# Altium PCB G_Humi_v2_PCB.PcbDoc
Units mm, origin at the board's own origin, x right, y up, seen from the top; angles counter-clockwise.
Board outline 22.5 x 83.5 mm, 2 copper layers (Top Layer, Bottom Layer), stack 1.571 mm thick; 11 components, 7 nets, 32 pads, 6 vias.
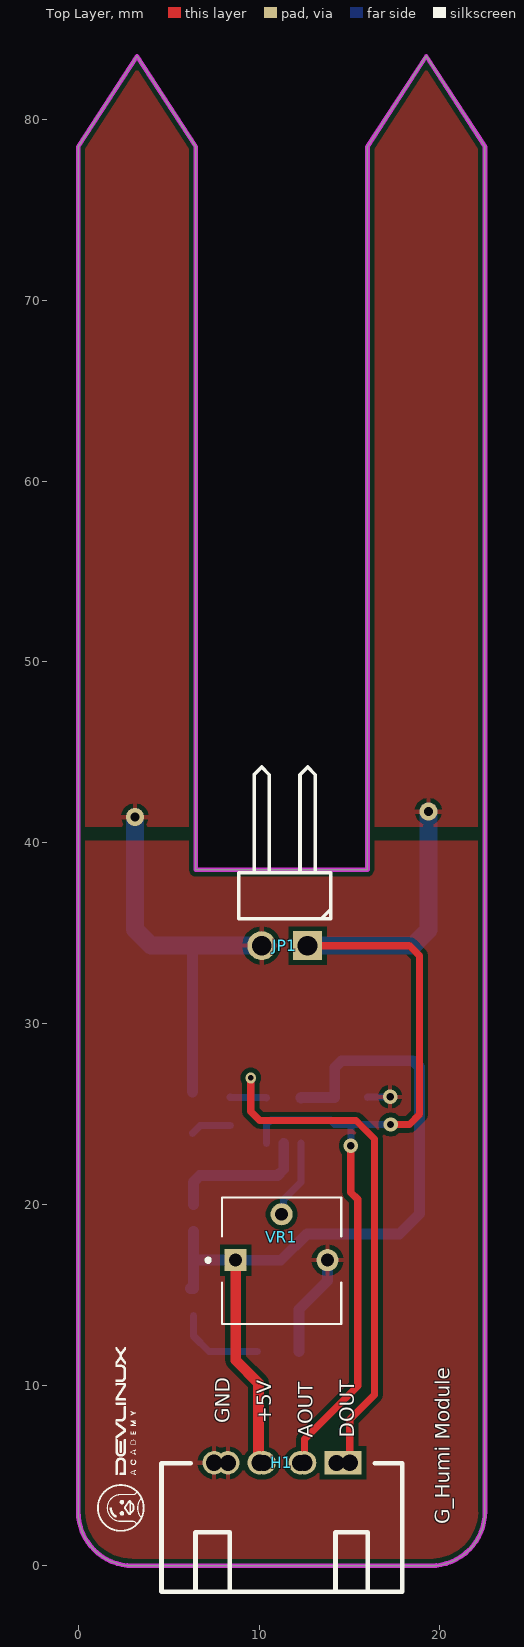
[diagram p0: Top Layer view]
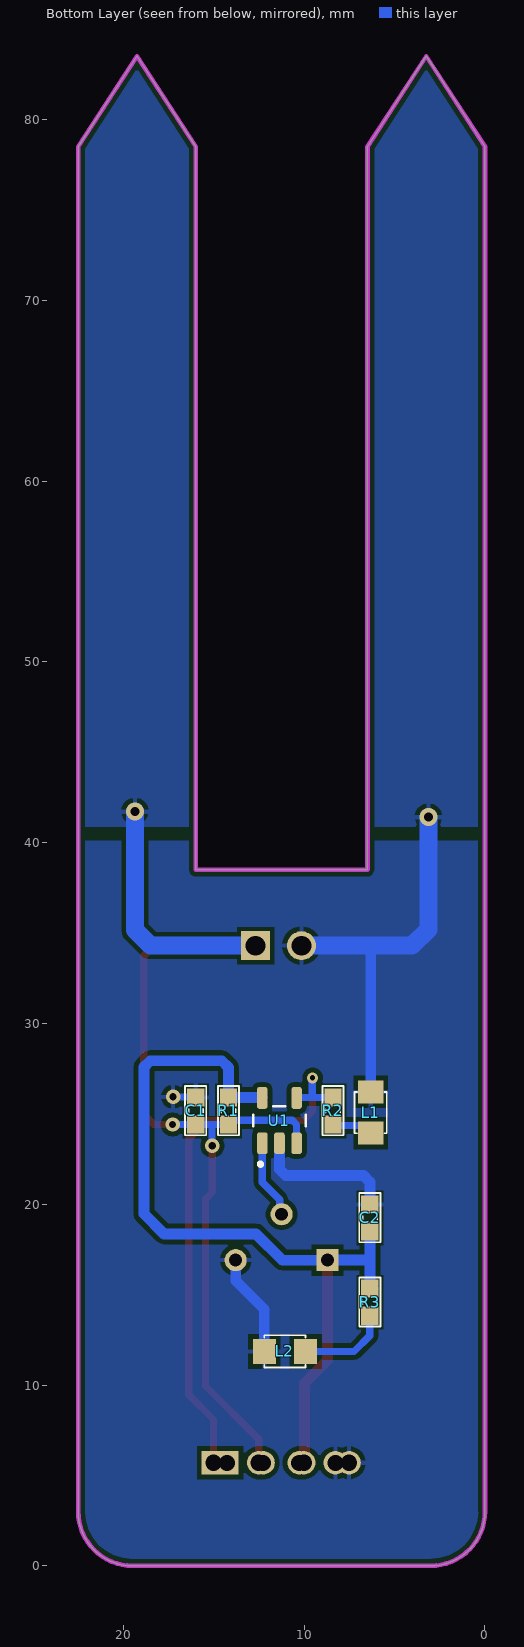
[diagram p1: Bottom Layer view, seen from below]
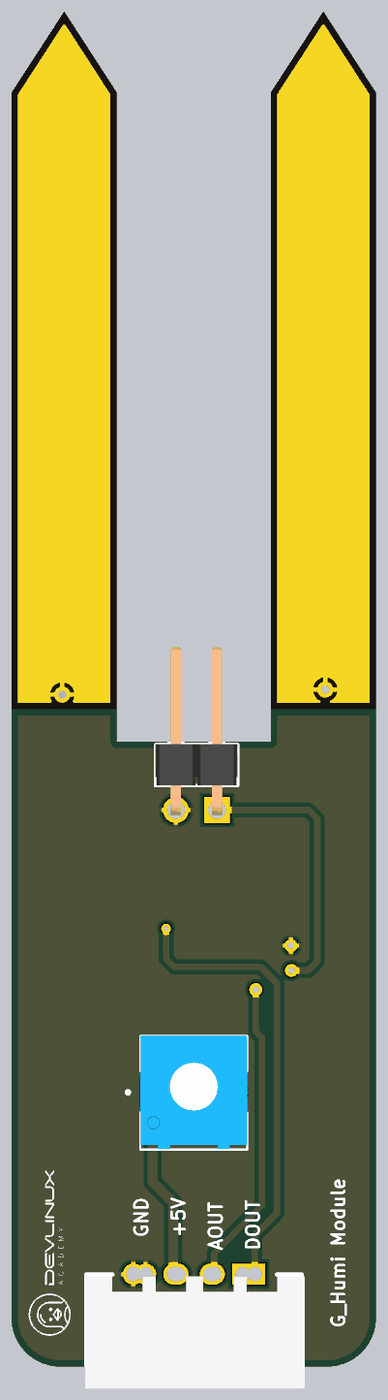
[diagram p2: 3D render of the assembled board from above, using the file's embedded part models]
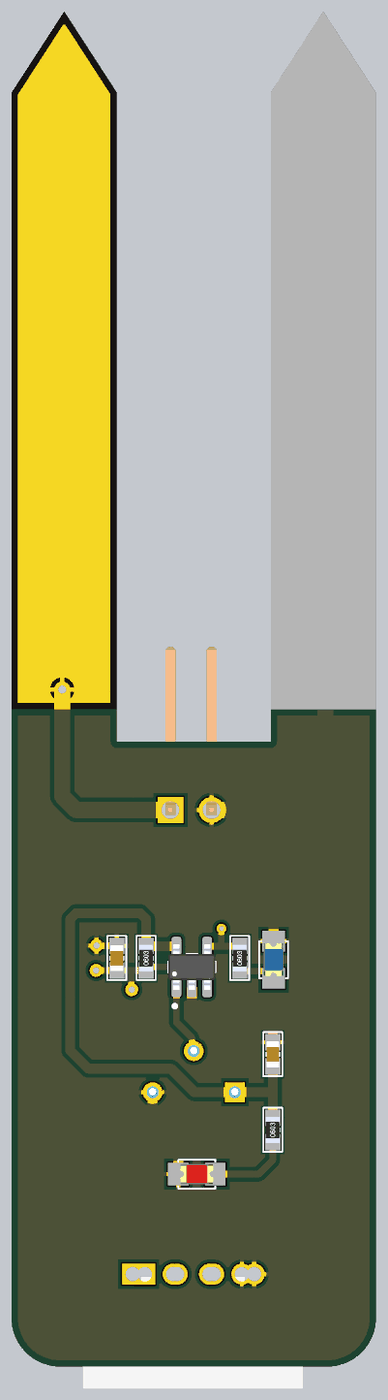
[diagram p3: 3D render of the assembled board from below, using the file's embedded part models]

## Layer stack, top to bottom
Top Solder: solder mask 0.0102, Solder Resist, Dk 3.5
Top Layer: signal copper 0.0356
Dielectric 1: dielectric 1.5, FR-4, Dk 4.8
Bottom Layer: signal copper 0.0356
Bottom Solder: solder mask 0.0102, Solder Resist, Dk 3.5

## Board outline
0,3 0,78.5 3.25,83.5 6.5,78.5 6.5,38.5 16,38.5 16,78.5 19.25,83.5 22.5,78.5 22.5,3 cw(c19.5,3) 19.5,0 3,0 cw(c3,3)

## Design rules (kind name [scope] priority, off if disabled: settings)
Clearance [All] p1: gap=0.254 ignorepadtopadclearanceinfootprint=FALSE except(0: Arc-Hole Track-Hole SMDPad-Hole THPad-Hole Via-Hole Fill-Hole Poly-Hole Region-Hole Text-Hole)
PolygonConnect [All] p1: connectstyle=Relief reliefconductorwidth=0.254 reliefentries=4 polygonreliefangle="90 Angle" airgapwidth=0.254
RoomDefinition G_Humi_v2_SCH [InComponentClass('G_Humi_v2_SCH')] p1: confinementstyle=ConfineIn formatcopy=TRUE lockcomponents=FALSE outline 28.133,-9.776 85.41,-9.776 85.41,8.385 28.133,8.385
RoutingVias [All] p1: holewidth=0.4 width=0.8 viastyle="Through Hole" minholewidth=0.3 minwidth=0.6 maxholewidth=0.5 maxwidth=1
SolderMaskExpansion [All] p1: expansion=0.102 istentingtop=FALSE
Width [All] p1: maxlimit=0.6 minlimit=0.254 preferedwidth=0.4
30 further rules are at their usual default settings.

## Components (designator, comment, footprint, x,y, rotation, side; value= is the part's Value field where it differs from the comment)
C1 "100nF" "tu 0603" 16,25.164 r90 bottom
C2 "100nF" "tu 0603" 6.37,19.24 r90 bottom
H1 "Header 4P 2.54 + 2.0 Duc Cong" "Header 4P DC 2.54 + 2.0" 14.995,5.675 r270 top
JP1 "JP 1x2 2.54" "JP 1x2 DC" 12.69,34.3 r180 top
L1 "LED BLUE" LED-0805-Blue 6.32,23.93 r90 bottom
L2 "LED RED" LED-0805-Red 9.92,11.86 r0 bottom
R1 "10k" "tro smd 0603" 14.19,25.164 r90 bottom
R2 "1k" "tro smd 0603" 8.41,25.164 r90 bottom
R3 "1k" "tro smd 0603" 6.37,14.58 r90 bottom
U1 "LM321MF" SOT95P280X145-5N 11.37,24.625 r90 bottom
VR1 "10k" TRIM_3362P-1-102 11.25,16.904 r0 top

## Footprints (in the part's own frame and the unit in brackets; to place one, negate y for a bottom-side part, rotate by r counter-clockwise, add the part's x,y. Pads: shape width x height; smd on the part's side, far side on the other; paste and mask are expansions set on the pad)
"Header 4P DC 2.54 + 2.0" [mm]
  rect 1.3x1.3 hole 0.889: 1(-0.025,0.025) 1(-0.022,-0.719)
  round 1.3 hole 0.889: 2(-0.025,-2.475) 2(-0.022,-2.719) 3(-0.025,-4.975) 3(-0.022,-4.719) 4(-0.025,-7.475) 4(-0.022,-6.718)
  silkscreen extent 0,-10.39 7.11,2.92, body extent 0.13,-10.48 7.06,3.11, height 7.38
"JP 1x2 DC" [mm] "JP 1x2 DC"
  rect 1.6x1.6 hole 1.1: 1(0,0)
  round 1.6 hole 1.1: 2(2.54,0)
  silkscreen extent -1.27,-9.88 3.81,-1.5, body extent -1.27,-10.06 3.81,0.3, height 2.55
LED-0805-Blue [mil]
  rect 50x55 smd: 1(0,0) 2(90,0)
  silkscreen extent 0,-35 90,35, body extent 5,-25 85,25, height 43
LED-0805-Red [mil]
  rect 50x55 smd: 1(0,0) 2(90,0)
  silkscreen extent 0,-35 90,35, body extent 5,-25 85,25, height 43
SOT95P280X145-5N [mm]
  rrect50% 1.21x0.59 smd: 1(-1.255,0.95) 2(-1.255,0) 3(-1.255,-0.95) 4(1.255,-0.95) 5(1.255,0.95)
  silkscreen extent -2.51,-1.45 0.8,1.45, body extent -1.4,-1.45 1.4,1.45, height 1.45
TRIM_3362P-1-102 [mm]
  rect 1.222x1.222 / inner round 1.222 / far side rect 1.222x1.222 hole 0.714: 1(-2.54,0)
  round 1.222 hole 0.714: 2(0,2.54) 3(2.54,0)
  silkscreen extent -4.16,-3.53 3.3,3.47, body extent -3.3,-3.49 3.3,3.49, height 4.88
"tro smd 0603" [mm] "Chip Capacitor, 2-Leads, Body 1,60x0,80mm, IPC Medium Density"
  rect 1x0.95 smd mask+0.076: 1(-0.75,0) 2(0.75,0)
  silkscreen extent -1.35,-0.58 1.37,0.58, body extent -0.82,-0.42 0.82,0.43, height 0.44
"tu 0603" [mm] "Chip Capacitor, 2-Leads, Body 1,60x0,80mm, IPC Medium Density"
  rect 1x0.95 smd mask+0.076: 1(-0.75,0) 2(0.75,0)
  silkscreen extent -1.35,-0.58 1.37,0.58, body extent -0.8,-0.4 0.8,0.4, height 0.9

## Part data
C1 C2: library part "Tu 0603 104 50V 10%", "Dán", Chung_Loai=Dán, Don_Vi=Con, Ma_Hang=MH004568, So_Chan=2, Ten_Linh_Kien="Tụ 0603 104-100nF 10% 50V"
H1: "Cắm", Chung_Loai=Cắm, Don_Vi=Con, Ma_Hang=MH001310, Ten_Linh_Kien="Header 4P XH2.54-4P Đực Cong"
JP1: library part "JP 1x2 2.54 Duc Cong", "Cắm", Chung_Loai=Cắm, Don_Vi=Con, Ma_Hang=MH000904, Ten_Linh_Kien="Jump Đơn Đực 2.54MM 1x40P Cong Đứng"
L1: library part "LED 0805 Xanh Duong", "Dán", Chung_Loai=Dán, Don_Vi=Con, Ma_Hang=MH002327, Ten_Linh_Kien="LED 0805 Màu Xanh Dương (Blue)"
L2: library part "LED 0805 Do", "Dán", Chung_Loai=Dán, Don_Vi=Con, Ma_Hang=MH000897, Ten_Linh_Kien="LED 0805 Màu Đỏ (Red)"
R1: library part "Tro 0603 1% 10k", "Dán", Chung_Loai=Dán, Don_Vi=Con, Ma_Hang=MH006333, So_Chan=2, Ten_Linh_Kien="Trở 0603 1% 10k"
R2 R3: library part "Tro 0603 1% 1k", "Dán", Chung_Loai=Dán, Don_Vi=Con, Ma_Hang=MH006334, So_Chan=2, Ten_Linh_Kien="Trở 0603 1% 1k"
U1: "Low Power Single Op Amp 5-SOT-23 -40 to 85", Package="SOT-23-5 Texas Instruments", Check_prices=https://www.snapeda.com/parts/LM321MF/Texas+Instruments/view-part/?ref=eda, MF="Texas Instruments", MP=LM321MF, SnapEDA_Link=https://www.snapeda.com/parts/LM321MF/Texas+Instruments/view-part/?ref=snap
VR1: library part "Bien tro vuong", "TRIMMER - 1/4in SQ ST CERMET", Package="3362P-1 Bourns Inc.", Check_prices=https://www.snapeda.com/parts/3362P-1-102/Bourns/view-part/?ref=eda, MF=Bourns, MP=3362P-1-102, SnapEDA_Link=https://www.snapeda.com/parts/3362P-1-102/Bourns/view-part/?ref=snap

## Via types
v1: diameter 0.8, hole 0.4, Top Layer to Bottom Layer, 3 vias
v2: diameter 1, hole 0.5, Top Layer to Bottom Layer, 2 vias
v3: diameter 0.6, hole 0.3, Top Layer to Bottom Layer, 1 vias

## Nets (pads, with @x,y where several pads share a name; then routed paths per layer and width w, separated by ;. In a path a pad name is that pad's centre, name@x,y a point inside that pad or via, vN(x,y) a via of type N, cw(c..) or ccw(c..) an arc to the next point about the centre after c; other vN are vias at no path point)
+5: C2.1 H1.3 R1.2 R3.2 U1.5 VR1.1 | length 45.2
  Top Layer w0.6: VR1.1 8.71,11.37 9.98,10.1 9.98,5.74 H1.3@10.02,5.7
  Bottom Layer w0.6: R3.2@6.195,15.35 6.215,15.33 R3.2 C2.1 ; 6.51,16.92 8.694,16.92 VR1.1 11.204,16.904 12.66,18.36 17.76,18.36 18.87,19.47 18.87,27.589 18.519,27.94 14.56,27.94 14.19,27.57 R1.2 14.173,25.897 12.325,25.897 12.32,25.892 U1.5
A_OUT: C1.1 H1.2 JP1.1 R1.1 U1.3 | length 58.8
  Top Layer w0.4: H1.2@12.52,5.7 12.52,7 15.46,9.94 15.46,20.27 15.08,20.65 v1(15.08,23.23) ; JP1.1 18.33,34.3 18.88,33.75 18.88,24.97 18.32,24.41 v1(17.28,24.41)
  Bottom Layer w0.4: U1.3 10.42,24.406 10.654,24.64 13.964,24.64 R1.1 15.095,24.414 ; v1(15.08,23.23) 15.095,23.245 15.095,24.414 ; v1(17.28,24.41) 16.275,24.41 C1.1 15.095,24.414
  Bottom Layer w1: JP1.1 18.51,34.3 19.37,35.16 v2(19.37,41.72)
D_OUT: H1.1 R2.2 U1.4 | length 30.6
  Top Layer w0.4: v3(9.54,26.99) 9.54,25.13 10.04,24.63 15.37,24.63 16.39,23.61 16.39,9.46 15.02,8.09 15.02,6.15 H1.1@14.94,6.07
  Bottom Layer w0.4: R2.2 8.427,25.897 9.55,25.897 ; v3(9.54,26.99) 9.55,26.98 9.55,25.897 ; U1.4 10.403,25.897 9.55,25.897
GND: C1.2 C2.2 H1.4 JP1.2 L1.2 L2.2 U1.2 VR1.3 | length 36.6
  Bottom Layer w0.4: C1.2 16.013,25.927 17.243,25.927 v1(17.256,25.94)
  Bottom Layer w0.6: L1.2 6.32,34.3 ; C2.2 6.37,21.229 6.721,21.58 11.019,21.58 11.37,21.931 U1.2 ; L2.2 12.206,14.186 13.79,15.77 VR1.3
  Bottom Layer w1: v2(3.13,41.41) 3.13,35.2 4.03,34.3 6.32,34.3 JP1.2
NetL1_1: L1.1 R2.1 | length 2.3
  Bottom Layer w0.4: L1.1 6.75,24.36 R2.1@8.41,24.36
NetL2_1: L2.1 R3.1 | length 5
  Bottom Layer w0.4: R3.1 6.37,12.73 7.24,11.86 L2.1
NetU1_1: U1.1 VR1.2 | length 4.4
  Bottom Layer w0.4: VR1.2 11.358,19.552 11.358,20.248 12.32,21.21 U1.1

## Polygon pours and split planes (outlines as drawn)
GND on Top Layer "NONET_L-01_P-001" (solid, remove dead copper, pour order 14): -1.25,-4.7 23.75,-4.7 23.75,40.5 -1.25,40.5
A_OUT on Top Layer "NONET_L-01_P-001" (solid, remove dead copper, pour order 21): 19.25,83.5 22.5,78.5 22.5,40.5 16,40.5 16,78.5
GND on Top Layer "NONET_L-01_P-001" (solid, remove dead copper, pour order 18): 3.25,83.5 6.5,78.5 6.5,40.5 0,40.5 0,78.5
GND on Bottom Layer "NONET_L-01_P-001" (solid, remove dead copper, pour order 8): -1.25,40.49 21.76,40.49 23.76,38.49 23.76,-4.7 -1.25,-4.7
A_OUT on Bottom Layer "NONET_L-01_P-001" (solid, remove dead copper, pour order 20): 19.25,83.5 22.5,78.5 22.5,40.5 16,40.5 16,78.5
GND on Bottom Layer "NONET_L-01_P-001" (solid, remove dead copper, pour order 19): 3.25,83.5 6.5,78.5 6.5,40.5 0,40.5 0,78.5

## Keep-outs
Keep-Out Layer:
  lines w0.254: 0,3 ccw(c3,3) 3,0 19.5,0 ccw(c19.5,3) 22.5,3 22.5,38.5 22.5,78.5 19.25,83.5 16,78.5 16,38.5 6.5,38.5 6.5,78.5 3.25,83.5 0,78.5 0,38.5 0,3

## Silkscreen, mask and mechanical layers (free items; w line width, h text height)
Top Overlay:
  drawing of 21 lines, arcs and shapes, not listed
  text "GND" at 8.39,7.88 h0.8 r90
  text "+5V" at 10.687,7.88 h0.8 r90
  text "AOUT" at 12.983,7.08 h0.8 r90
  text "DOUT" at 15.28,7.08 h0.8 r90
  text "G_Humi Module" at 20.557,2.3 h0.8 r90
Bottom Paste:
  region: 3.25,83.5 6.5,78.5 6.5,40.5 0,40.51 0,78.5
Top Solder:
  region: 19.25,83.5 22.5,78.5 22.5,40.5 16,40.5 16,78.5
  region: 3.25,83.5 6.5,78.5 6.5,40.5 0,40.51 0,78.5
Bottom Solder:
  region: 3.25,83.5 6.5,78.5 6.5,40.5 0,40.51 0,78.5
  region: 19.25,83.5 22.5,78.5 22.5,40.5 16,40.5 16,78.5